# Altium PCB SSOP-TSSOP28.PcbDoc
Units mil, origin at the board's own origin, x right, y up, seen from the top; angles counter-clockwise.
Board outline 800 x 1400 mil, 2 copper layers (Top Layer, Bottom Layer); 3 components, 28 nets, 56 pads, 0 vias.
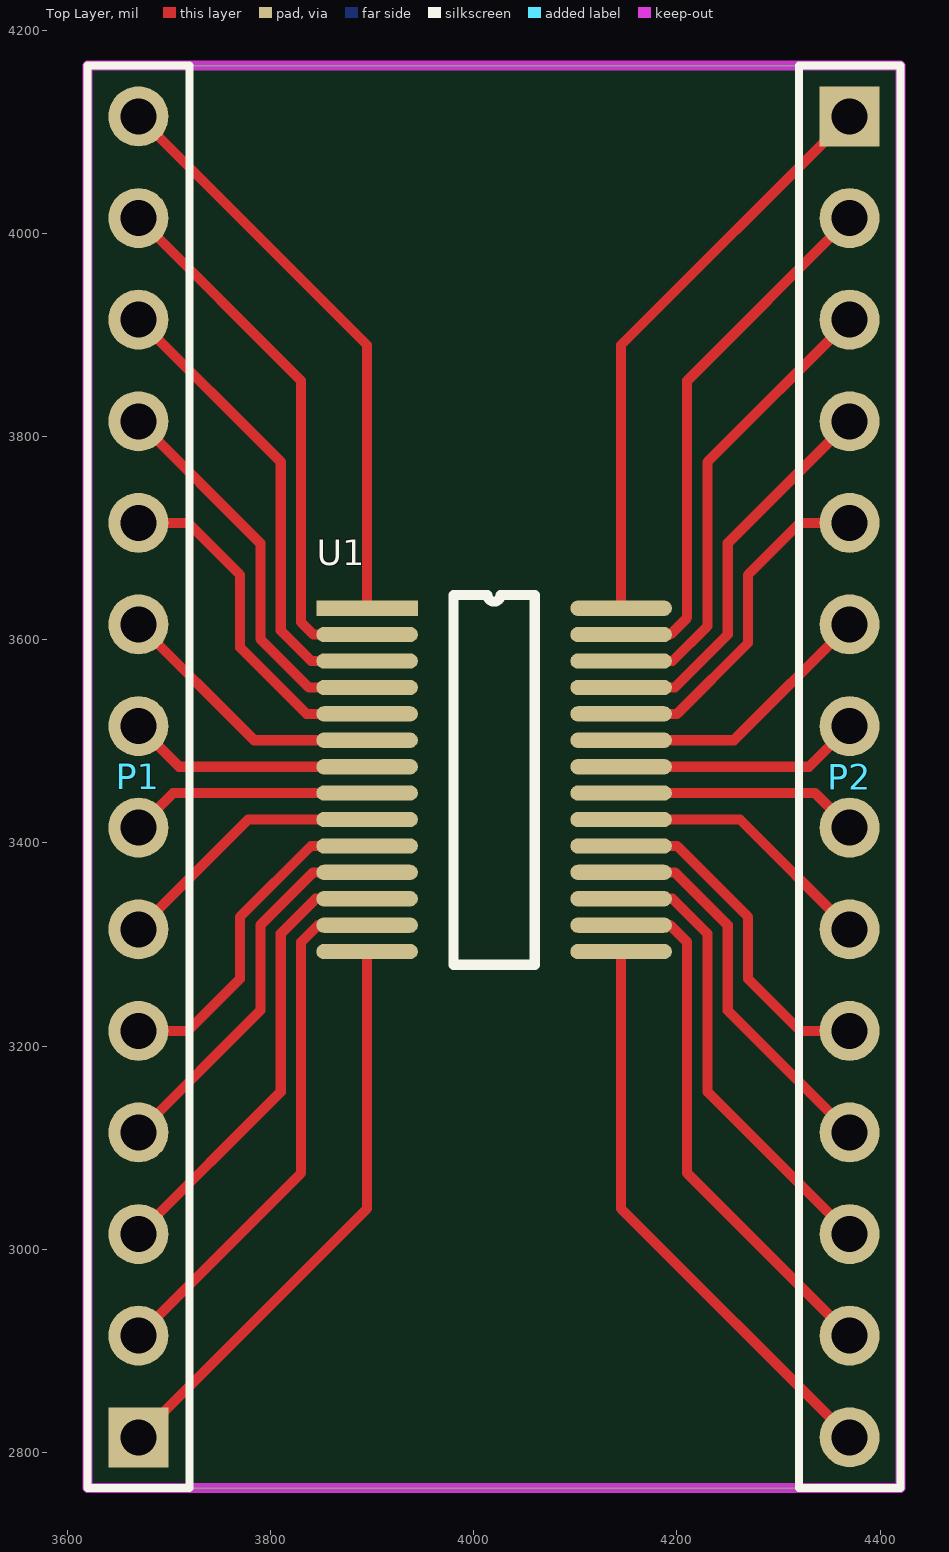
[diagram p0: Top Layer view]
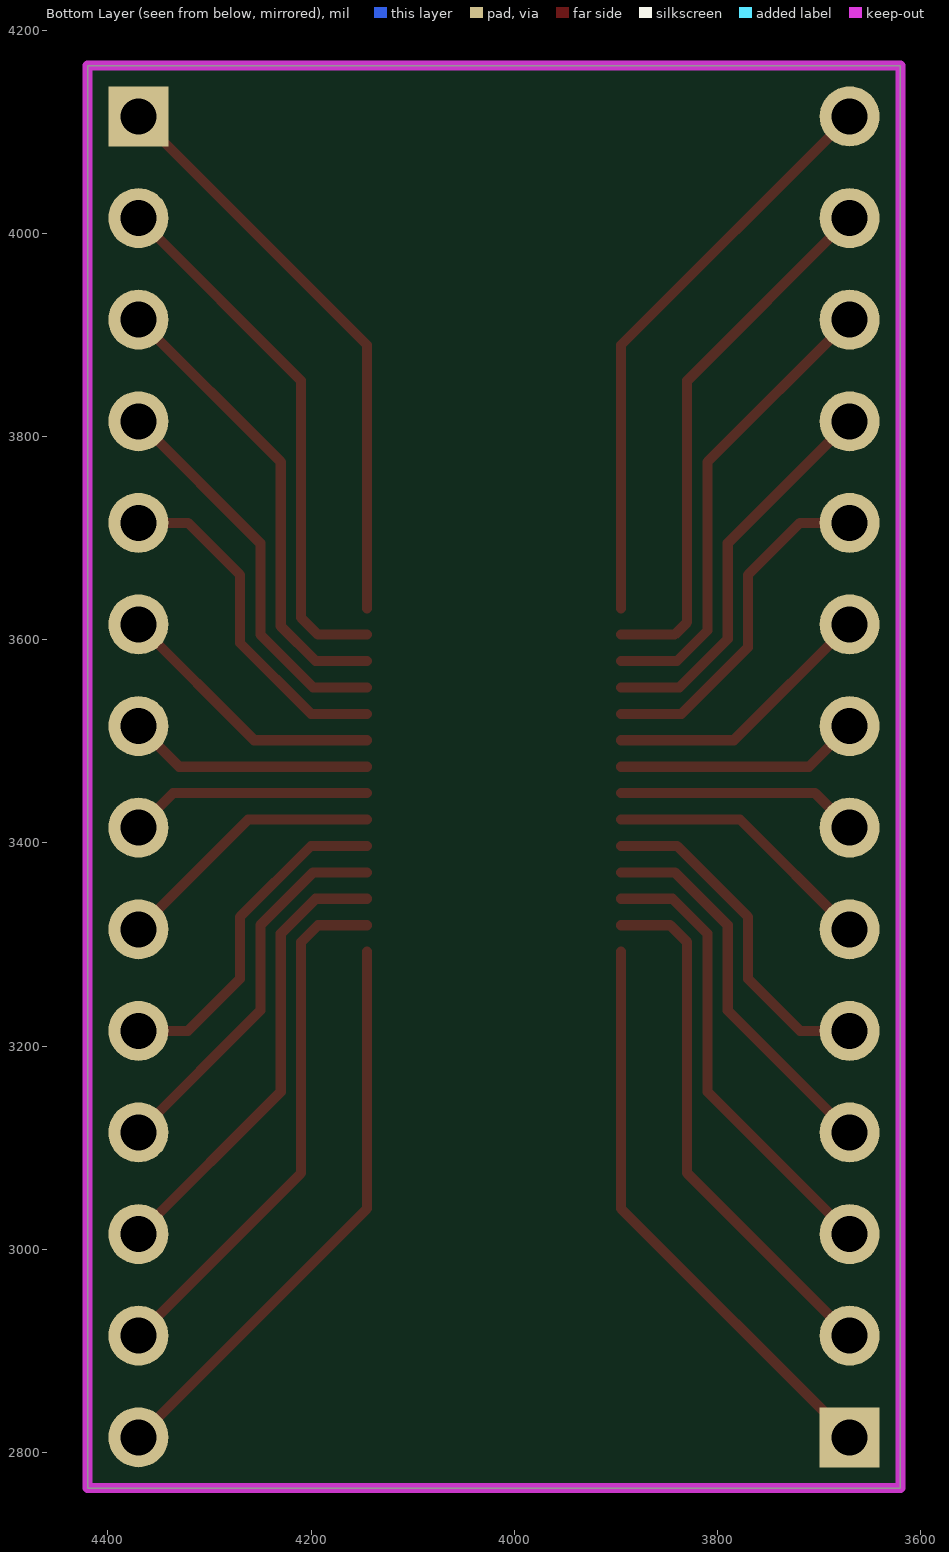
[diagram p1: Bottom Layer view, seen from below]

## Layer stack, top to bottom
Top Solder: solder mask 0.4, Solder Resist, Dk 3.5
Top Layer: signal copper 1.4
Dielectric 1: dielectric 12.6, FR-4, Dk 4.8
Bottom Layer: signal copper 1.4
Bottom Solder: solder mask 0.4, Solder Resist, Dk 3.5

## Board outline
3620,2765 3620,4165 4420,4165 4420,2765

## Design rules (kind name [scope] priority, off if disabled: settings)
Clearance [All] p1: gap=10 ignorepadtopadclearanceinfootprint=FALSE except(0: Arc-Hole Track-Hole SMDPad-Hole THPad-Hole Via-Hole Fill-Hole Poly-Hole Region-Hole Text-Hole)
PolygonConnect [All] p1: connectstyle=Relief reliefconductorwidth=10 reliefentries=4 polygonreliefangle="90 Angle" airgapwidth=10
RoutingVias [All] p1: holewidth=28 width=50 viastyle="Through Hole" minholewidth=28 minwidth=50 maxholewidth=28 maxwidth=50
SolderMaskExpansion [All] p1: expansion=4
Width [All] p1: maxlimit=10 minlimit=8 preferedwidth=10 bottomlayer_minwidth=10 minimp=50.000000 maximp=50.000000 favimp=50.000000
30 further rules are at their usual default settings.

## Components (designator, comment, footprint, x,y, rotation, side; value= is the part's Value field where it differs from the comment)
P1 "Header 14" HDR1X14 3670,2815 r90 top
P2 "Header 14" HDR1X14 4370,4115 r270 top
U1 "SSOP-TSSOP28" SSOP-TSSOP28 3895,3631 r0 top

## Footprints (in the part's own frame and the unit in brackets; to place one, negate y for a bottom-side part, rotate by r counter-clockwise, add the part's x,y. Pads: shape width x height; smd on the part's side, far side on the other; paste and mask are expansions set on the pad)
HDR1X14 [mm] "Connector; Header; 14 Position"
  rect 1.5x1.5 hole 0.9: 1(0,0)
  round 1.5 hole 0.9: 2(2.54,0) 3(5.08,0) 4(7.62,0) 5(10.16,0) 6(12.7,0) 7(15.24,0) 8(17.78,0) 9(20.32,0) 10(22.86,0) 11(25.4,0) 12(27.94,0) 13(30.48,0) 14(33.02,0)
  silkscreen extent -1.27,-1.27 34.29,1.27
SSOP-TSSOP28 [mil]
  rect 100x15 smd: 1(0,0)
  oval 100x15 smd: 2(0,-26) 3(0,-52) 4(0,-78) 5(0,-104) 6(0,-130) 7(0,-156) 8(0,-182) 9(0,-208) 10(0,-234) 11(0,-260) 12(0,-286) 13(0,-312) 14(0,-338) 15(250,-338) 16(250,-312) 17(250,-286) 18(250,-260) 19(250,-234) 20(250,-208) 21(250,-182) 22(250,-156) 23(250,-130) 24(250,-104) 25(250,-78) 26(250,-52) 27(250,-26) 28(250,0)
  silkscreen extent 85,-351 165,13

## Part data
P1 P2: "Header, 14-Pin", LatestRevisionDate=17-Jul-2002, LatestRevisionNote="Re-released for DXP Platform.", Publisher="Altium Limited"

## Nets (pads, with @x,y where several pads share a name; then routed paths per layer and width w, separated by ;. In a path a pad name is that pad's centre, name@x,y a point inside that pad or via, vN(x,y) a via of type N, cw(c..) or ccw(c..) an arc to the next point about the centre after c; other vN are vias at no path point)
NetP1_1: P1.1 U1.14 | length 571.2
  Top Layer w10: P1.1 3895,3040 U1.14
NetP1_2: P1.2 U1.13 | length 525.5
  Top Layer w10: P1.2 3830,3075 3830,3302.32 3846.68,3319 U1.13
NetP1_3: P1.3 U1.12 | length 452.8
  Top Layer w10: P1.3 3810,3155 3810,3310.6 3844.4,3345 U1.12
NetP1_4: P1.4 U1.11 | length 380.2
  Top Layer w10: P1.4 3790,3235 3790,3318.89 3842.11,3371 U1.11
NetP1_5: P1.5 U1.10 | length 336.1
  Top Layer w10: P1.5 3718.83,3215 3770,3266.17 3770,3327.17 3839.83,3397 U1.10
NetP1_6: P1.6 U1.9 | length 269.7
  Top Layer w10: P1.6 3778,3423 U1.9
NetP1_7: P1.7 U1.8 | length 239.1
  Top Layer w10: P1.7 3704,3449 U1.8
NetP1_8: P1.8 U1.7 | length 241.6
  Top Layer w10: P1.8 3710,3475 U1.7
NetP1_9: P1.9 U1.6 | length 272.2
  Top Layer w10: P1.9 3784,3501 U1.6
NetP1_10: P1.10 U1.5 | length 344.7
  Top Layer w10: P1.10 3718.83,3715 3770,3663.83 3770,3592.43 3835.43,3527 U1.5
NetP1_11: P1.11 U1.4 | length 388.8
  Top Layer w10: P1.11 3790,3695 3790,3600.72 3837.72,3553 U1.4
NetP1_12: P1.12 U1.3 | length 461.4
  Top Layer w10: P1.12 3810,3775 3810,3609 3840,3579 U1.3
NetP1_13: P1.13 U1.2 | length 534.1
  Top Layer w10: P1.13 3830,3855 3830,3617.29 3842.29,3605 U1.2
NetP1_14: P1.14 U1.1 | length 577.2
  Top Layer w10: P1.14 3895,3890 U1.1
NetP2_1: P2.1 U1.28 | length 577.2
  Top Layer w10: U1.28 4145,3890 P2.1
NetP2_2: P2.2 U1.27 | length 531.5
  Top Layer w10: U1.27 4193.32,3605 4210,3621.68 4210,3855 P2.2
NetP2_3: P2.3 U1.26 | length 458.8
  Top Layer w10: U1.26 4195.6,3579 4230,3613.4 4230,3775 P2.3
NetP2_4: P2.4 U1.25 | length 386.2
  Top Layer w10: U1.25 4197.89,3553 4250,3605.11 4250,3695 P2.4
NetP2_5: P2.5 U1.24 | length 342.1
  Top Layer w10: U1.24 4200.17,3527 4270,3596.83 4270,3663.83 4321.17,3715 P2.5
NetP2_6: P2.6 U1.23 | length 272.2
  Top Layer w10: U1.23 4256,3501 P2.6
NetP2_7: P2.7 U1.22 | length 241.6
  Top Layer w10: U1.22 4330,3475 P2.7
NetP2_8: P2.8 U1.21 | length 239.1
  Top Layer w10: U1.21 4336,3449 P2.8
NetP2_9: P2.9 U1.20 | length 269.7
  Top Layer w10: U1.20 4262,3423 P2.9
NetP2_10: P2.10 U1.19 | length 336.1
  Top Layer w10: U1.19 4200.17,3397 4270,3327.17 4270,3266.17 4321.17,3215 P2.10
NetP2_11: P2.11 U1.18 | length 380.2
  Top Layer w10: U1.18 4197.89,3371 4250,3318.89 4250,3235 P2.11
NetP2_12: P2.12 U1.17 | length 452.8
  Top Layer w10: U1.17 4195.6,3345 4230,3310.6 4230,3155 P2.12
NetP2_13: P2.13 U1.16 | length 525.5
  Top Layer w10: U1.16 4193.32,3319 4210,3302.32 4210,3075 P2.13
NetP2_14: P2.14 U1.15 | length 571.2
  Top Layer w10: U1.15 4145,3040 P2.14

## Keep-outs
Keep-Out Layer:
  the board outline again, w10